# Altium PCB PCB1.PcbDoc
Units mm, origin at the board's own origin, x right, y up, seen from the top; angles counter-clockwise.
Board outline 38 x 37.5 mm, 2 copper layers (Top Layer, Bottom Layer); 4 components, 9 nets, 28 pads, 4 vias.
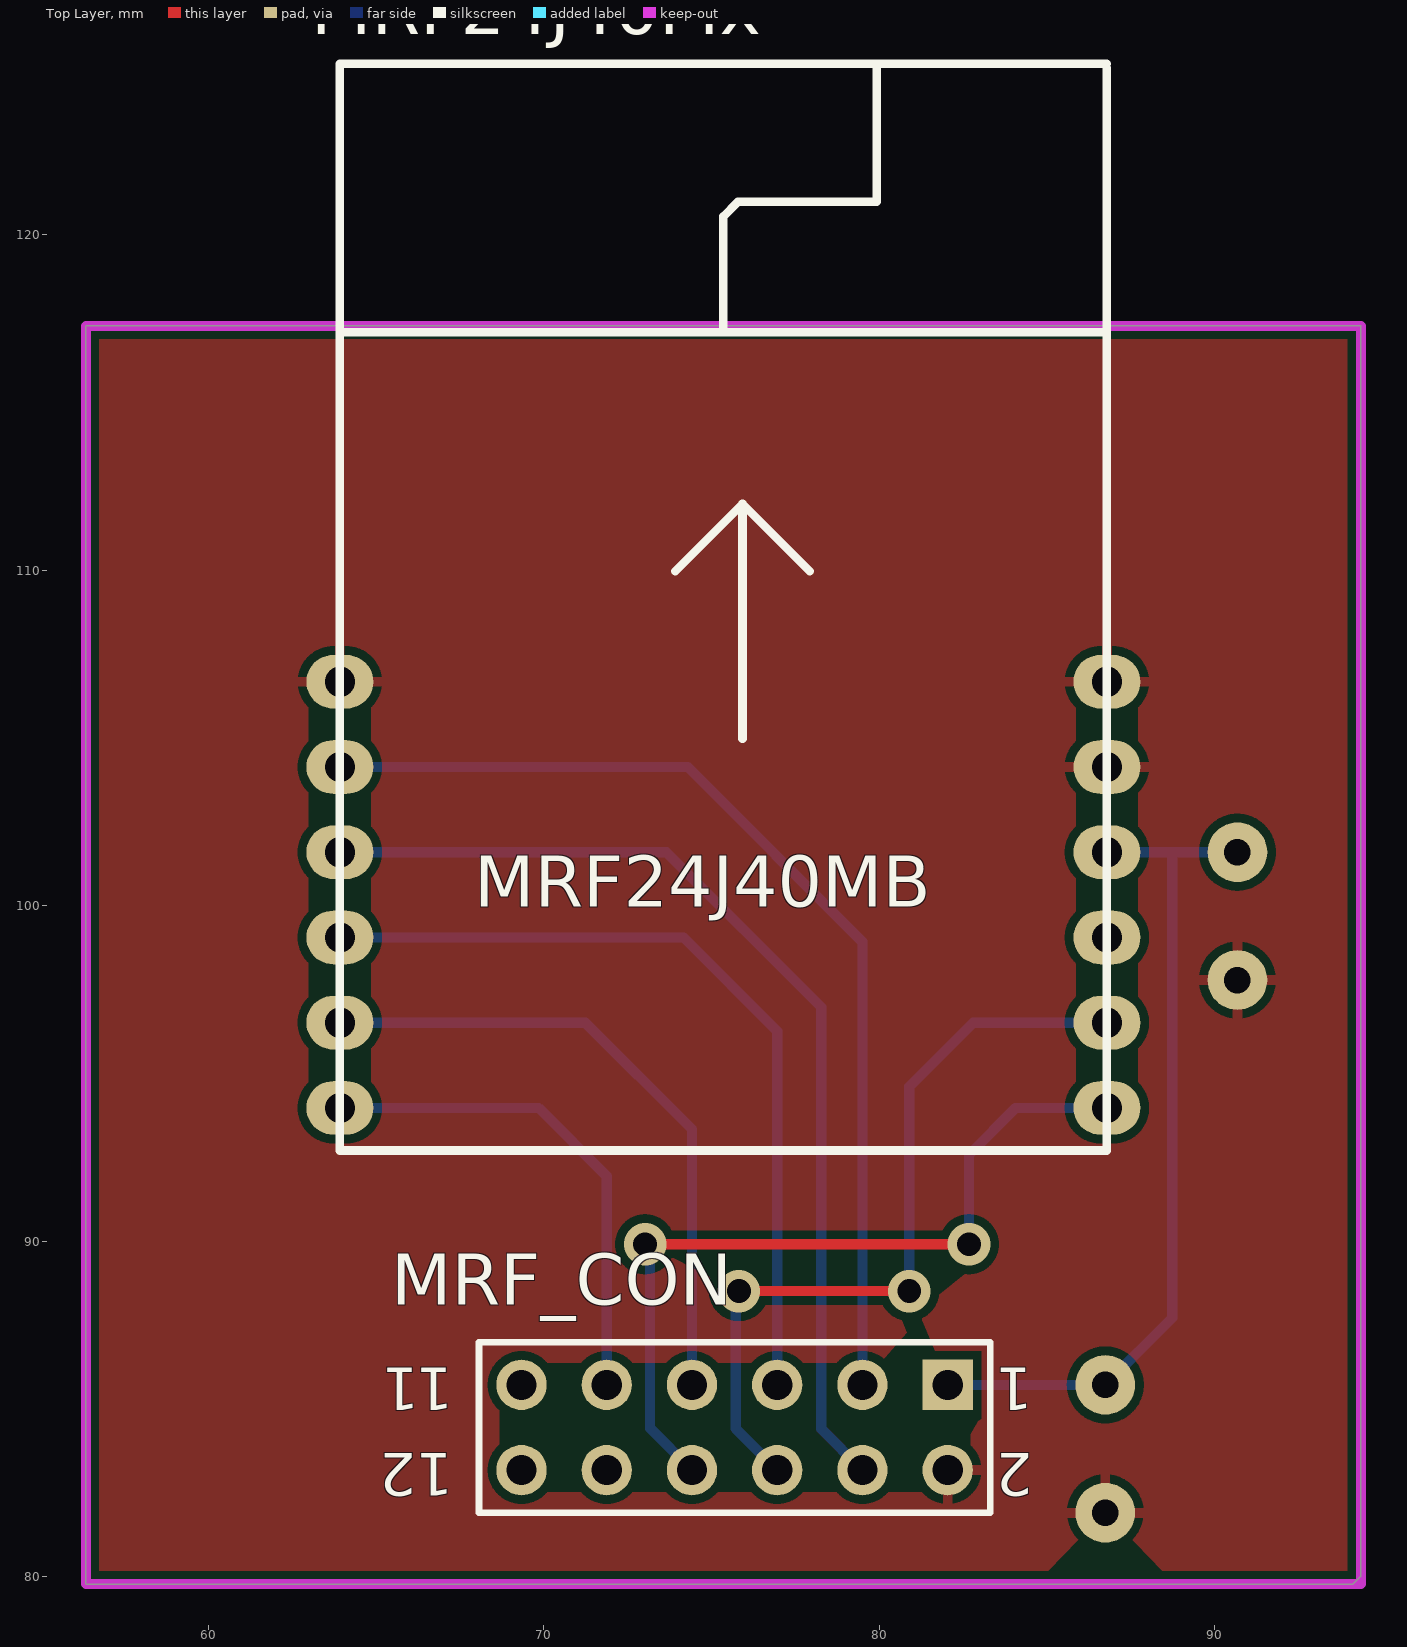
[diagram p0: Top Layer view]
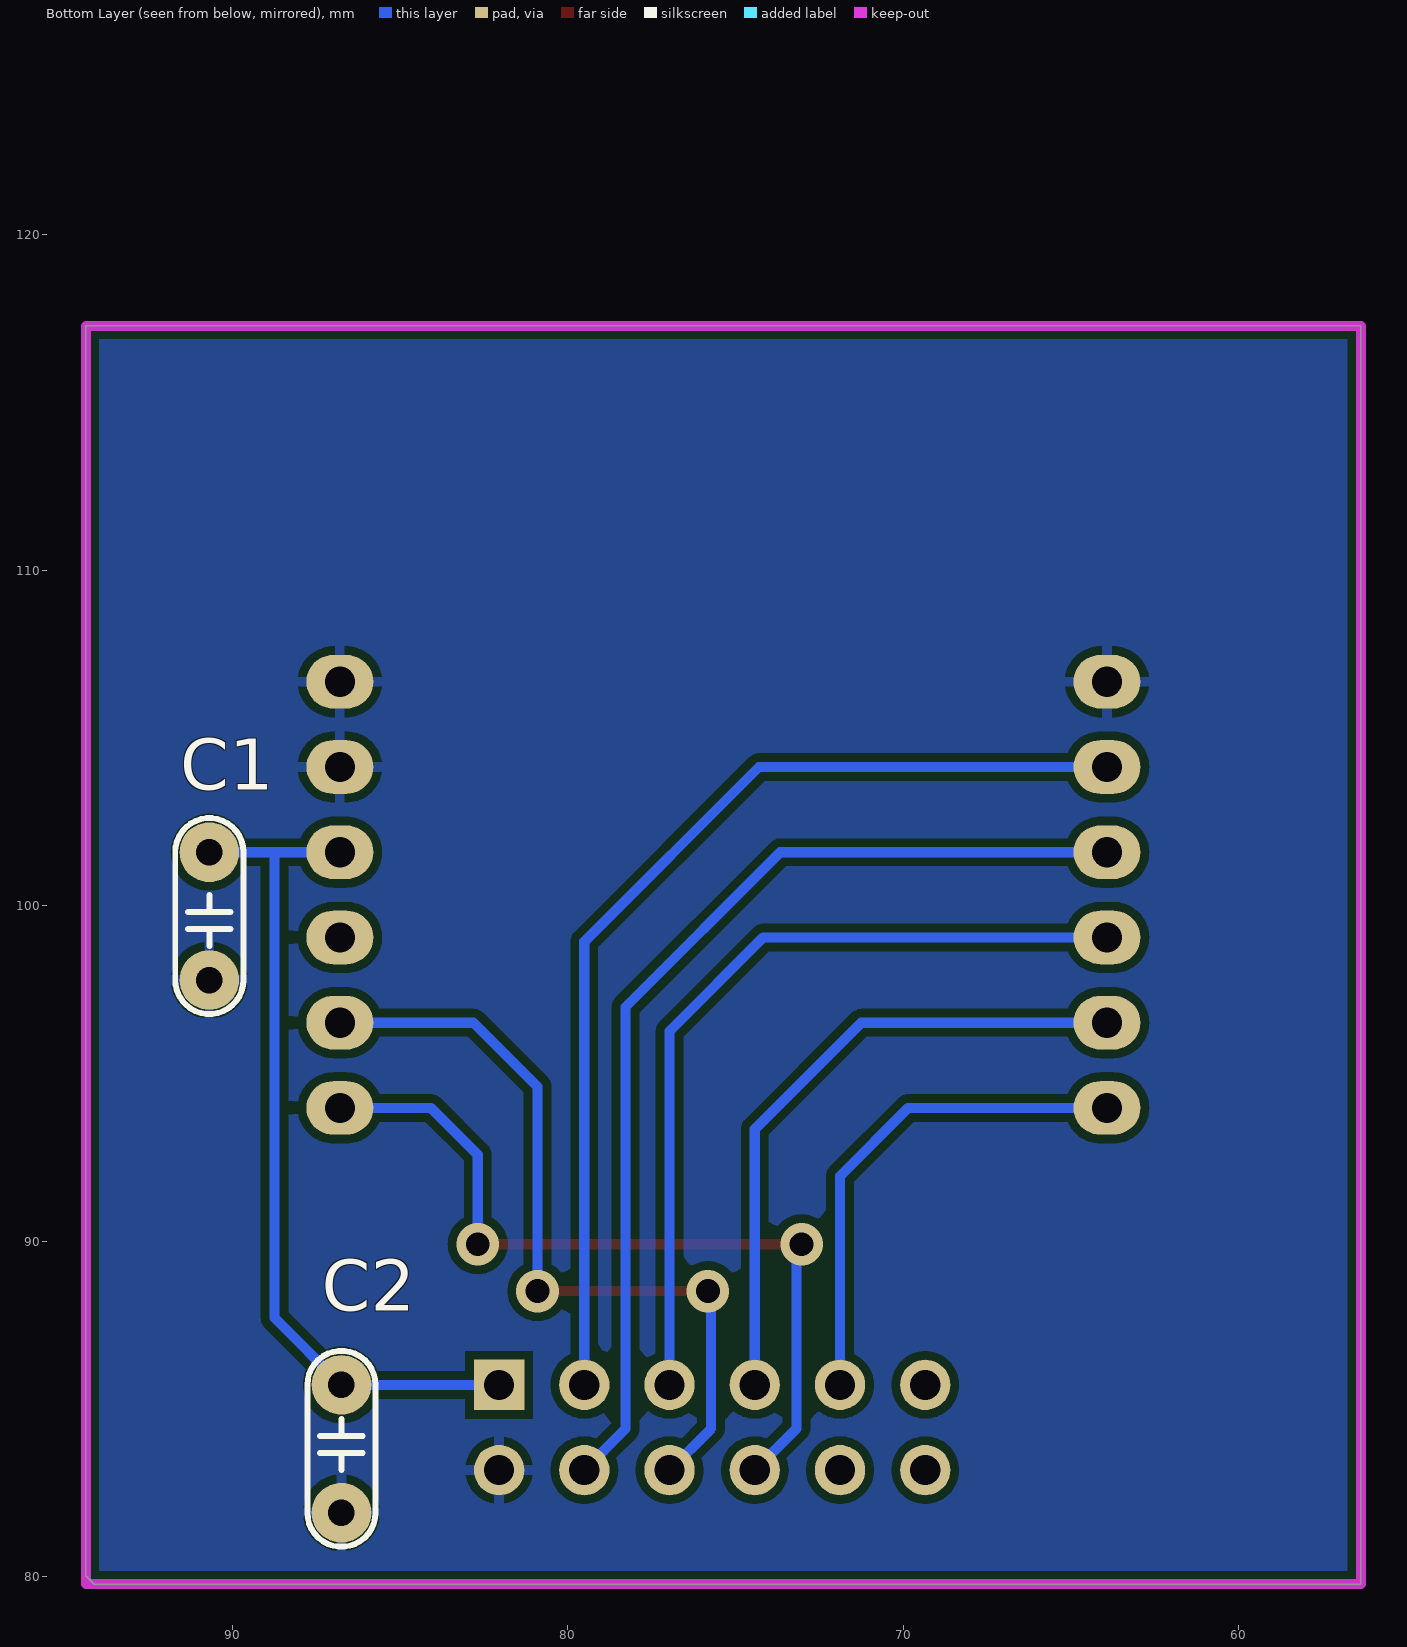
[diagram p1: Bottom Layer view, seen from below]

## Layer stack, top to bottom
Top Layer: signal copper 0.0356
Dielectric: dielectric 0.32, FR-4, Dk 4.8
Bottom Layer: signal copper 0.0356

## Board outline
56.358,117.286 94.358,117.286 94.358,80.037 94.107,79.786 56.358,79.786

## Design rules (kind name [scope] priority, off if disabled: settings)
Clearance [All] p1: gap=0.254
PlaneConnect [All] p1: planeconnectstyle=Relief reliefexpansion=0.508 reliefentries=4 reliefconductorwidth=0.254 reliefairgap=0.305
PolygonConnect [All] p1: connectstyle=Relief reliefconductorwidth=0.305 reliefentries=4 polygonreliefangle="90 Angle"
RoomDefinition Sheet2 [InComponentClass('Sheet2')] p1: confinementstyle=ConfineIn formatcopy=TRUE lockcomponents=FALSE outline 96.774,80.01 116.332,80.01 116.332,102.743 96.774,102.743
RoutingVias [All] p1: holewidth=0.711 width=1.27 viastyle="Through Hole" minholewidth=0.711 minwidth=1.27 maxholewidth=0.711 maxwidth=1.27
SilkscreenOverComponentPads [All] p1: minsilkscreentomaskgap=0.254
SolderMaskExpansion [All] p1: expansion=0.102
Width [All] p1: maxlimit=0.5 minlimit=0.254 preferedwidth=0.254
26 further rules are at their usual default settings.

## Components (designator, comment, footprint, x,y, rotation, side; value= is the part's Value field where it differs from the comment)
C1 "Cap" CN1.5 90.678,97.79 r90 bottom
C2 "Cap" CN1.5 86.741,85.725 r270 bottom
MRF24J40Mx "MRF24J40MB" MRF24J40MB 63.928,93.98 r0 top
MRF_CON "Header 6X2" HDR2X6 82.042,85.725 r180 top

## Footprints (in the part's own frame and the unit in brackets; to place one, negate y for a bottom-side part, rotate by r counter-clockwise, add the part's x,y. Pads: shape width x height; smd on the part's side, far side on the other; paste and mask are expansions set on the pad)
CN1.5 [mil]
  round 70 hole 31: 1(0,0) 2(150,0)
  silkscreen extent -40,-40 190,40, body extent -40,-33 190,33, height 235
HDR2X6 [mm] "Connector; Header; 6x2 Position"
  rect 1.5x1.5 hole 0.9: 1(0,0)
  round 1.5 hole 0.9: 2(0,2.54) 3(2.54,0) 4(2.54,2.54) 5(5.08,0) 6(5.08,2.54) 7(7.62,0) 8(7.62,2.54) 10(10.16,2.54) 11(12.7,0) 12(12.7,2.54)
  round 1.5 hole 0.9 mask+0.102: 9(10.16,0)
  silkscreen extent -1.27,-1.27 13.97,3.81
MRF24J40MB [mm] "Microchip Zigbee Module"
  oval 2x1.6 hole 0.9: 1(0,12.7) 2(0,10.16) 3(0,7.62) 4(0,5.08) 5(0,2.54) 6(0,0) 7(22.86,0) 8(22.86,2.54) 9(22.86,5.08) 10(22.86,7.62) 11(22.86,10.16) 12(22.86,12.7)
  silkscreen extent 0,-1.27 22.86,31.11

## Part data
C1 C2: "Capacitor"
MRF_CON: "Header, 6-Pin, Dual row"

## Via types
v1: diameter 1.27, hole 0.711, Top Layer to Bottom Layer, 4 vias

## Nets (pads, with @x,y where several pads share a name; then routed paths per layer and width w, separated by ;. In a path a pad name is that pad's centre, name@x,y a point inside that pad or via, vN(x,y) a via of type N, cw(c..) or ccw(c..) an arc to the next point about the centre after c; other vN are vias at no path point)
3.3VDC: C1.2 C2.1 MRF24J40Mx.10 MRF_CON.1 | length 25.3
  Bottom Layer w0.305: MRF_CON.1 C2.1 88.733,87.717 88.733,101.6 ; MRF24J40Mx.10 88.733,101.6 ; C1.2 88.733,101.6
CS: MRF24J40Mx.8 MRF_CON.6 | length 24.2
  Top Layer w0.305: v1(75.819,88.519) v1(80.899,88.519)
  Bottom Layer w0.254: MRF_CON.6@76.708,83.185 MRF_CON.6
  Bottom Layer w0.305: v1(75.819,88.519) 75.692,88.519 75.565,88.392 75.725,88.232 75.725,84.422 MRF_CON.6 ; v1(80.899,88.519) 80.899,94.615 82.804,96.52 MRF24J40Mx.8
GND: C1.1 C2.2 MRF24J40Mx.1 MRF24J40Mx.11 MRF24J40Mx.12 MRF_CON.2
INT: MRF24J40Mx.4 MRF_CON.5 | length 24.7
  Bottom Layer w0.305: MRF24J40Mx.4 74.168,99.06 76.962,96.266 MRF_CON.5
RESET: MRF24J40Mx.2 MRF_CON.3 | length 30.9
  Bottom Layer w0.305: MRF24J40Mx.2 74.295,104.14 79.502,98.933 MRF_CON.3
SCK: MRF24J40Mx.6 MRF_CON.9 | length 15
  Bottom Layer w0.305: MRF24J40Mx.6 69.85,93.98 71.882,91.948 MRF_CON.9
SDI: MRF24J40Mx.5 MRF_CON.7 | length 19.4
  Bottom Layer w0.305: MRF24J40Mx.5 71.247,96.52 74.422,93.345 MRF_CON.7
SDO: MRF24J40Mx.7 MRF_CON.8 | length 24.3
  Top Layer w0.305: v1(73.025,89.916) v1(82.677,89.916)
  Bottom Layer w0.305: v1(73.025,89.916) 73.175,89.766 73.175,84.432 MRF_CON.8 ; v1(82.677,89.916) 82.677,92.583 84.074,93.98 MRF24J40Mx.7
WAKE: MRF24J40Mx.3 MRF_CON.4 | length 30.6
  Bottom Layer w0.305: MRF24J40Mx.3 73.66,101.6 78.275,96.985 78.275,84.412 MRF_CON.4
pads on no net: MRF24J40Mx.9 MRF_CON.10 MRF_CON.11 MRF_CON.12

## Polygon pours and split planes (outlines as drawn)
GND on Bottom Layer "Top Layer-No Net" (solid, pour order 2): 56.358,117.286 94.358,117.286 94.358,79.786 56.358,79.786
GND on Top Layer "Top Layer-No Net" (solid, pour order 4): 56.346,117.175 56.807,117.636 94.346,117.636 94.346,80.136 56.346,80.136

## Keep-outs
Keep-Out Layer:
  lines w0.3: 56.358,79.786 56.358,117.286 94.358,117.286 94.358,79.786 56.358,79.786

## Silkscreen, mask and mechanical layers (free items; w line width, h text height)
Mechanical 4:
  lines w0.254: 56.358,79.786 94.11,79.786 94.234,79.91 94.234,116.905 93.853,117.286 ; 56.358,117.286 94.358,117.286
Drill Drawing:
  text ".LEGEND" at 100.738,83.566 h1.52
  text "Drill Drawing." at 100.738,81.026 h1.52

## Dimensions
56.358,79.786 to 56.358,117.286 on Mechanical 1
56.358,79.786 to 94.358,79.786 on Mechanical 1

## Text inside footprints (layer, text, board x,y; h text height)
MRF_CON: Top Overlay "2" at 84.582,83.693 h1.27 r180; Top Overlay "1" at 84.582,86.233 h1.27 r180; Top Overlay "1" at 67.31,86.233 h1.27 r180; Top Overlay "1" at 66.294,86.233 h1.27 r180; Top Overlay "12" at 67.31,83.693 h1.27 r180